# EAGLE board hm-11 (EAGLE 7.3.0)
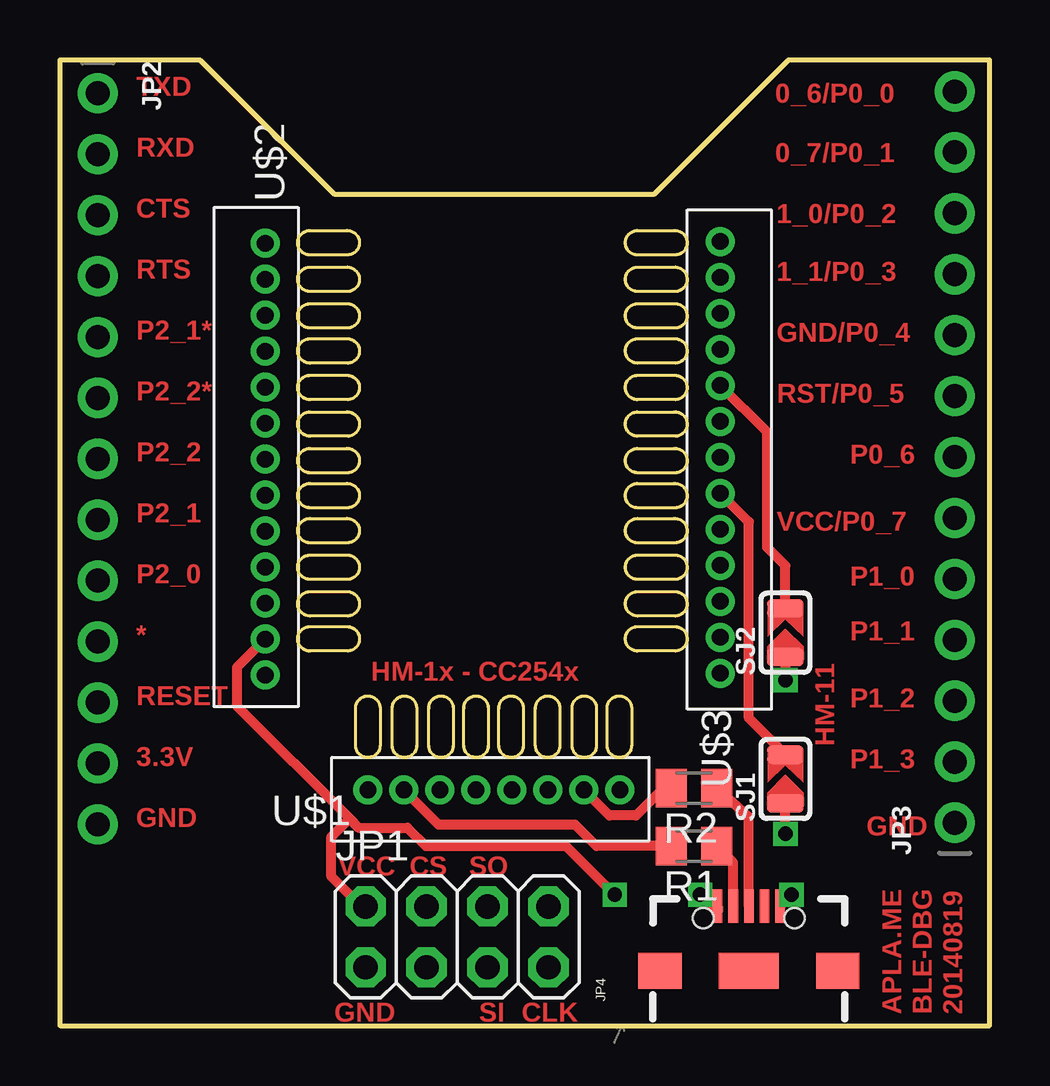
[diagram p0: board, top side]
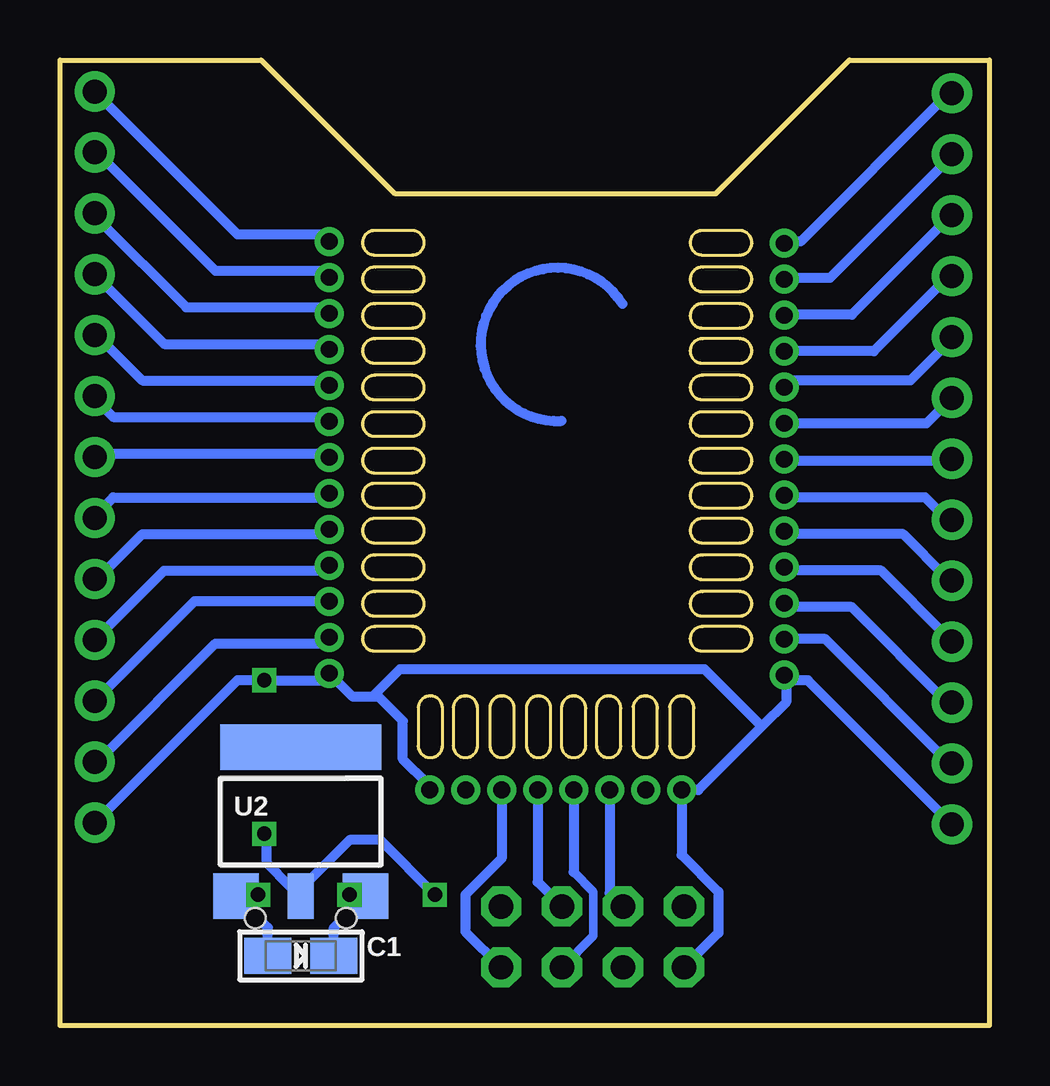
[diagram p1: board, bottom side, seen from below]

Size 38.73 x 40.26 mm. Coordinates in mm from the lower left corner, seen from the top.
Outline: 0,0 38.73,0 38.73,40.26 30.35,40.26 24.77,34.67 11.43,34.67 5.84,40.26 0,40.26 0,0
Outline: 10.41,33.15 11.94,33.15 arc-180 12,32.13 10.41,32.13 arc-180 10.41,33.15
Outline: 10.41,31.62 11.94,31.62 arc-180 12,30.61 10.41,30.61 arc-180 10.41,31.62
Outline: 10.41,30.1 11.94,30.1 arc-180 12,29.08 10.41,29.08 arc-180 10.41,30.1
Outline: 10.41,28.64 11.94,28.64 arc-180 12,27.62 10.41,27.62 arc-180 10.41,28.64
Outline: 10.41,27.12 11.94,27.12 arc-180 12,26.1 10.41,26.1 arc-180 10.41,27.12
Outline: 10.41,25.59 11.94,25.59 arc-180 12,24.57 10.41,24.57 arc-180 10.41,25.59
Outline: 10.41,24.07 11.94,24.07 arc-180 12,23.05 10.41,23.05 arc-180 10.41,24.07
Outline: 10.41,22.61 11.94,22.61 arc-180 12,21.59 10.41,21.59 arc-180 10.41,22.61
Outline: 10.41,21.14 11.94,21.14 arc-180 12,20.13 10.41,20.13 arc-180 10.41,21.14
Outline: 10.41,19.62 11.94,19.62 arc-180 12,18.61 10.41,18.61 arc-180 10.41,19.62
Outline: 10.41,18.1 11.94,18.1 arc-180 12,17.08 10.41,17.08 arc-180 10.41,18.1
Outline: 10.41,16.64 11.94,16.64 arc-180 12,15.62 10.41,15.62 arc-180 10.41,16.64
Outline: 12.32,11.68 12.32,13.21 arc-180 13.33,13.27 13.33,11.68 arc-180 12.32,11.68
Outline: 13.84,11.68 13.84,13.21 arc-180 14.86,13.27 14.86,11.68 arc-180 13.84,11.68
Outline: 15.37,11.68 15.37,13.21 arc-180 16.38,13.27 16.38,11.68 arc-180 15.37,11.68
Outline: 16.83,11.68 16.83,13.21 arc-180 17.84,13.27 17.84,11.68 arc-180 16.83,11.68
Outline: 18.29,11.68 18.29,13.21 arc-180 19.3,13.27 19.3,11.68 arc-180 18.29,11.68
Outline: 19.81,11.68 19.81,13.21 arc-180 20.83,13.27 20.83,11.68 arc-180 19.81,11.68
Outline: 21.34,11.68 21.34,13.21 arc-180 22.35,13.27 22.35,11.68 arc-180 21.34,11.68
Outline: 22.8,11.68 22.8,13.21 arc-180 23.81,13.27 23.81,11.68 arc-180 22.8,11.68
Outline: 24.07,33.15 25.59,33.15 arc-180 25.65,32.13 24.07,32.13 arc-180 24.07,33.15
Outline: 24.07,31.62 25.59,31.62 arc-180 25.65,30.61 24.07,30.61 arc-180 24.07,31.62
Outline: 24.07,30.1 25.59,30.1 arc-180 25.65,29.08 24.07,29.08 arc-180 24.07,30.1
Outline: 24.07,28.64 25.59,28.64 arc-180 25.65,27.62 24.07,27.62 arc-180 24.07,28.64
Outline: 24.07,27.12 25.59,27.12 arc-180 25.65,26.1 24.07,26.1 arc-180 24.07,27.12
Outline: 24.07,25.59 25.59,25.59 arc-180 25.65,24.57 24.07,24.57 arc-180 24.07,25.59
Outline: 24.07,24.07 25.59,24.07 arc-180 25.65,23.05 24.07,23.05 arc-180 24.07,24.07
Outline: 24.07,22.61 25.59,22.61 arc-180 25.65,21.59 24.07,21.59 arc-180 24.07,22.61
Outline: 24.07,21.14 25.59,21.14 arc-180 25.65,20.13 24.07,20.13 arc-180 24.07,21.14
Outline: 24.07,19.62 25.59,19.62 arc-180 25.65,18.61 24.07,18.61 arc-180 24.07,19.62
Outline: 24.07,18.1 25.59,18.1 arc-180 25.65,17.08 24.07,17.08 arc-180 24.07,18.1
Outline: 24.07,16.64 25.59,16.64 arc-180 25.65,15.62 24.07,15.62 arc-180 24.07,16.64
Copper layers (1*16): Top 0.035mm / dielectric 1.5mm / Bottom 0.035mm
Design rules "default": minimum track width 10mil, minimum drill 24mil, track to track 8mil, track to pad 8mil, pad to pad 8mil, via to via 8mil, smd to smd 8mil, copper to edge 40mil, drill to drill 8mil, minimum pad ring 10mil, minimum via ring 8mil, stop-mask expansion 4mil, vias tented up to drill 0mil, thermal gap 10mil
Net classes: 0 default: width 0.406 mm

## Footprints (pad centres in the part's own frame; a part is rotated, then mirrored left to right if it is on the bottom)
EIA3216-18/A-R = smd 1.95 x 1.5: + 1.375,0; - -1.375,0
2X04 = drill 1.016 pad 1.676 octagon: 1 -3.81,-1.27; 2 -3.81,1.27; 3 -1.27,-1.27; 4 -1.27,1.27; 5 1.27,-1.27; 6 1.27,1.27; 7 3.81,-1.27; 8 3.81,1.27
1X13_ROUND_70 = drill 1 pad 1.676: 1 -15.24,0; 2 -12.7,0; 3 -10.16,0; 4 -7.62,0; 5 -5.08,0; 6 -2.54,0; 7 0,0; 8 2.54,0; 9 5.08,0; 10 7.62,0; 11 10.16,0; 12 12.7,0; 13 15.24,0
USB-B-MICRO-SMD_V03 = smd 1.4 x 0.4: D+1 2.7,0; D-1 2.7,0.65; GND1 2.7,-1.3; ID1 2.7,-0.65; VBUS1 2.7,1.3 | smd 1.5 x 1.8: SHIELD1 0,3.7; SHIELD2 0,-3.7 | smd 1.5 x 2.5: SHIELD3 0,0 | hole 0.85: 2.2,1.9; 2.2,-1.9
M0805 = smd 1.3 x 1.6: 1 -0.95,0; 2 0.95,0
SOLDERJUMPER_ARROW_NOPASTE = smd 0.762 x 1.524: 1 -1.016,0; 2 1.016,0
SOT223-W = smd 1.9 x 1.9: 1 -2.7,-3.1; 3 2.7,-3.1 | smd 1.1 x 1.9: 2 0,-3.1 | smd 6.7 x 1.9: 4 0,3.1
B8B-ZR = drill 0.7: 1 -4.85,-0.03; 2 -3.35,-0.03; 3 -1.85,-0.03; 4 -0.35,-0.03; 5 1.15,-0.03; 6 2.65,-0.03; 7 4.15,-0.03; 8 5.65,-0.03
B13B-ZR = drill 0.7: 1 -8.66,-0.03; 2 -7.16,-0.03; 3 -5.66,-0.03; 4 -4.16,-0.03; 5 -2.66,-0.03; 6 -1.16,-0.03; 7 0.34,-0.03; 8 1.84,-0.03; 9 3.34,-0.03; 10 4.84,-0.03; 11 6.34,-0.03; 12 7.84,-0.03; 13 9.34,-0.03

## Placement (x,y rotation side)
C1  [EIA3216-18/A-R]  28.7,2.92 0 bottom
JP1  [2X04]  16.55,3.7 0 top
JP2  [1X13_ROUND_70]  1.57,23.63 270 top
JP3  [1X13_ROUND_70]  37.29,23.71 90 top
JP4  USB_MICROB_PLUGCONN-11752  [USB-B-MICRO-SMD_V03]  28.7,2.29 90 top
R1  33  [M0805]  26.42,7.49 180 top
R2  33  [M0805]  26.42,9.91 180 top
SJ1  [SOLDERJUMPER_ARROW_NOPASTE]  30.23,10.29 90 top
SJ2  [SOLDERJUMPER_ARROW_NOPASTE]  30.23,16.38 90 top
U2  [SOT223-W]  28.7,8.51 0 bottom
U$1  B8B-ZR  [B8B-ZR]  17.68,9.86 0 top
U$2  B13B-ZR  [B13B-ZR]  8.58,23.96 270 top
U$3  B13B-ZR  [B13B-ZR]  27.48,23.36 90 top

## Library data of the parts
C1 JP2 JP3 U2 = microbuilder
JP1 = adafruit
JP4 = SparkFun-Connectors; PROD_ID: CONN-11752
R1 R2 = resistor; SPICEPREFIX: R
SJ1 SJ2 = microbuilder; BOM: EXCLUDE
U$1-U$3 = jst

## Nets
AGND: C1.- JP4.GND1 U2.1
CTS: JP2.3 U$2.3
D+: JP4.D+1 R2.1
D-: JP4.D-1 R1.1
GND: JP2.13 JP3.1 SJ2.1 U$2.13 U$3.1
N$1: R1.2 U$1.2
N$2: R2.2 U$1.7
N$9: JP2.9 U$2.9
N$10: JP2.10 U$2.10
N$12: JP1.1 U$1.1
N$13: JP1.4 U$1.3
N$14: JP1.5 U$1.4
N$15: JP3.2 U$3.2
N$16: JP3.3 U$3.3
N$17: JP3.4 U$3.4
N$18: JP3.5 U$3.5
N$19: JP3.6 SJ1.2 U$3.6
N$20: JP3.7 U$3.7
N$21: JP3.8 U$3.8
N$22: JP3.9 SJ2.2 U$3.9
N$23: JP3.10 U$3.10
N$24: JP3.11 U$3.11
N$25: JP3.12 U$3.12
N$26: JP3.13 U$3.13
N$27: JP1.6 U$1.5
N$28: JP1.7 U$1.6
PCM_CLK: JP2.5 U$2.5
PCM_IN: JP2.7 U$2.7
PCM_OUT: JP2.6 U$2.6
PCM_SYNC: JP2.8 U$2.8
RST: JP2.11 U$2.11
RTS: JP2.4 U$2.4
RXD: JP2.2 U$2.2
TXD: JP2.1 U$2.1
USBVCC: C1.+ JP4.VBUS1 U2.3
VCC: JP1.2 JP2.12 SJ1.1 U2.2 U$2.12

## Tracks (layer width: path | path; a pad name or v marks a point on that pad's centre or on a via)
AGND  (via drill 0.6)
  Top 0.406: JP4.GND1 v30.48,5.46
  Bottom 0.406: v30.48,5.46 31.35,5.46 U2.1 30.08,4.08 C1.-
CTS
  Bottom 0.406: U$2.3 8.48,29.64 5.74,29.64 1.78,33.6 JP2.3
D+
  Top 0.406: JP4.D+1 28.7,8.7 R2.1
D-
  Top 0.406: JP4.D-1 28.05,6.81 R1.1
GND  (via drill 0.6)
  Top 0.406: SJ2.1 v30.23,14.4
  Bottom 0.406: JP3.1 37.14,8.61 31.34,14.4 v30.23,14.4 27.69,14.4 U$3.1 26.53,13.72 25.72,13.72 | 8.48,14.4 7.57,14.4 1.78,8.61 JP2.13 1.47,8.31 | 12.14,9.83 12.75,9.83 | 9.49,12.48 8.48,13.49 8.48,14.4 | 9.49,12.48 12.14,9.83 | 8.48,14.4 U$2.13 | 12.15,9.83 12.14,9.83 | 9.49,12.48 11.87,14.86 24.57,14.86 25.72,13.72 | 23.42,9.83 23.42,10.08 24.45,11.11 24.45,12.7 25.46,13.72 25.72,13.72
N$1
  Top 0.406: R1.2 22.35,7.49 21.46,8.38 15.78,8.38 U$1.2
N$2
  Top 0.406: R2.2 25.15,9.91 24,8.76 22.9,8.76 U$1.7
N$3
  Bottom 0.406: 15.3,30.1 arc-241 17.84,25.21
N$9
  Bottom 0.406: U$2.9 8.48,20.5 3.61,20.5 1.78,18.67 JP2.9
N$10
  Bottom 0.406: U$2.10 8.48,18.97 4.52,18.97 1.78,16.23 JP2.10
N$12
  Bottom 0.406: U$1.1 12.83,7.12 11.3,5.59 11.3,3.87 JP1.1
N$13
  Bottom 0.406: U$1.3 15.83,5.53 JP1.4
N$14
  Bottom 0.356: JP1.5 16.51,3.74 16.51,5.59 17.33,6.41
  Bottom 0.406: U$1.4 17.33,6.41
N$15
  Bottom 0.406: U$3.2 27.69,15.93 32.26,15.93 37.14,11.05 JP3.2
N$16
  Bottom 0.406: U$3.3 33.14,17.7 JP3.3
N$17
  Bottom 0.406: U$3.4 27.69,18.97 34.39,18.97 37.14,16.23 JP3.4
N$18
  Bottom 0.406: U$3.5 27.69,20.5 35.31,20.5 37.14,18.67 JP3.5
N$19
  Top 0.406: U$3.6 28.7,21.01 28.7,12.83 SJ1.2
  Bottom 0.406: U$3.6 27.69,22.02 36.53,22.02 37.14,21.41 JP3.6
N$20
  Bottom 0.406: U$3.7 27.69,23.85 37.14,23.85 JP3.7
N$21
  Bottom 0.406: U$3.8 27.69,25.38 36.53,25.38 37.14,25.98 JP3.8
N$22
  Top 0.406: SJ2.2 30.23,19.18 29.46,19.94 29.46,24.74 U$3.9
  Bottom 0.406: U$3.9 27.69,26.9 35.31,26.9 37.14,28.73 JP3.9
N$23
  Bottom 0.406: U$3.10 27.69,28.42 34.39,28.42 37.14,31.17 JP3.10
N$24
  Bottom 0.406: U$3.11 27.69,29.95 33.48,29.95 37.14,33.6 JP3.11
N$25
  Bottom 0.406: U$3.12 27.69,31.47 32.26,31.47 37.14,36.35 JP3.12
N$26
  Bottom 0.406: U$3.13 27.69,32.99 31.34,32.99 37.14,38.79 JP3.13
N$27
  Bottom 0.406: U$1.5 18.83,5.99 JP1.6
N$28
  Bottom 0.406: U$1.6 20.33,6.97 21.84,5.46 21.84,3.92 JP1.7
PCM_CLK
  Bottom 0.406: U$2.5 8.48,26.9 3.3,26.9 1.78,28.42 JP2.5
PCM_IN
  Bottom 0.406: U$2.7 8.48,23.55 1.78,23.55 JP2.7
PCM_OUT
  Bottom 0.406: U$2.6 2.63,25.12 JP2.6
PCM_SYNC
  Bottom 0.406: U$2.8 8.48,22.02 2.69,22.02 1.78,21.11 JP2.8
RST
  Bottom 0.406: U$2.11 8.48,17.45 5.74,17.45 1.78,13.49 JP2.11
RTS
  Bottom 0.406: U$2.4 8.48,28.12 4.83,28.12 1.78,31.17 JP2.4
RXD
  Bottom 0.406: U$2.2 8.48,31.17 6.66,31.17 1.78,36.04 JP2.2
TXD
  Bottom 0.406: U$2.1 8.48,32.69 7.87,32.69 1.78,38.79 JP2.1
USBVCC  (via drill 0.6)
  Top 0.406: JP4.VBUS1 27.4,4.73 v26.67,5.46
  Bottom 0.406: v26.67,5.46 26.05,5.46 U2.3 27.33,4.08 C1.+
VCC  (via drill 0.6)
  Top 0.406: U$2.12 7.37,14.93 7.37,13.34 12.06,8.64 | 12.06,8.64 12.45,8.25 14.48,8.25 15.24,7.49 21.08,7.49 v23.11,5.46 | v30.23,8 SJ1.1 | JP1.2 12.55,4.97 11.3,6.22 11.3,7.87 12.06,8.64
  Bottom 0.406: JP2.12 1.78,11.05 6.85,16.12 U$2.12 | 29.13,5.79 28.91,5.56 U2.2 | 29.13,5.79 30.12,6.78 30.12,7.9 v30.23,8 | 29.13,5.79 28.63,5.79 26.67,7.75 25.4,7.75 v23.11,5.46

## Text on the board
Top: TXD | 0_6/P0_0 | RXD | 0_7/P0_1 | CTS | 1_0/P0_2 | RTS | 1_1/P0_3 | P2_1* | GND/P0_4 | P2_2* | RST/P0_5 | P2_2 | P0_6 | P2_1 | VCC/P0_7 | P2_0 | P1_0 | * | P1_1 | HM-1x - CC254x | RESET | P1_2 | 3.3V | HM-11 | P1_3 | GND | GND | VCC | CS | SO | GND | SI | CLK | APLA.ME | BLE-DBG | 20140819